# Altium PCB MOTOR_DRIVER.PcbDoc (part 2 of 2)
Units mm, origin at the board's own origin, x right, y up, seen from the top; angles counter-clockwise.
Board outline 115 x 60 mm, 2 copper layers (Top Layer, Bottom Layer), stack 1.58 mm thick; 121 components, 33 nets, 418 pads, 33 vias.
Unrouted connection lines stored in the file: 233.
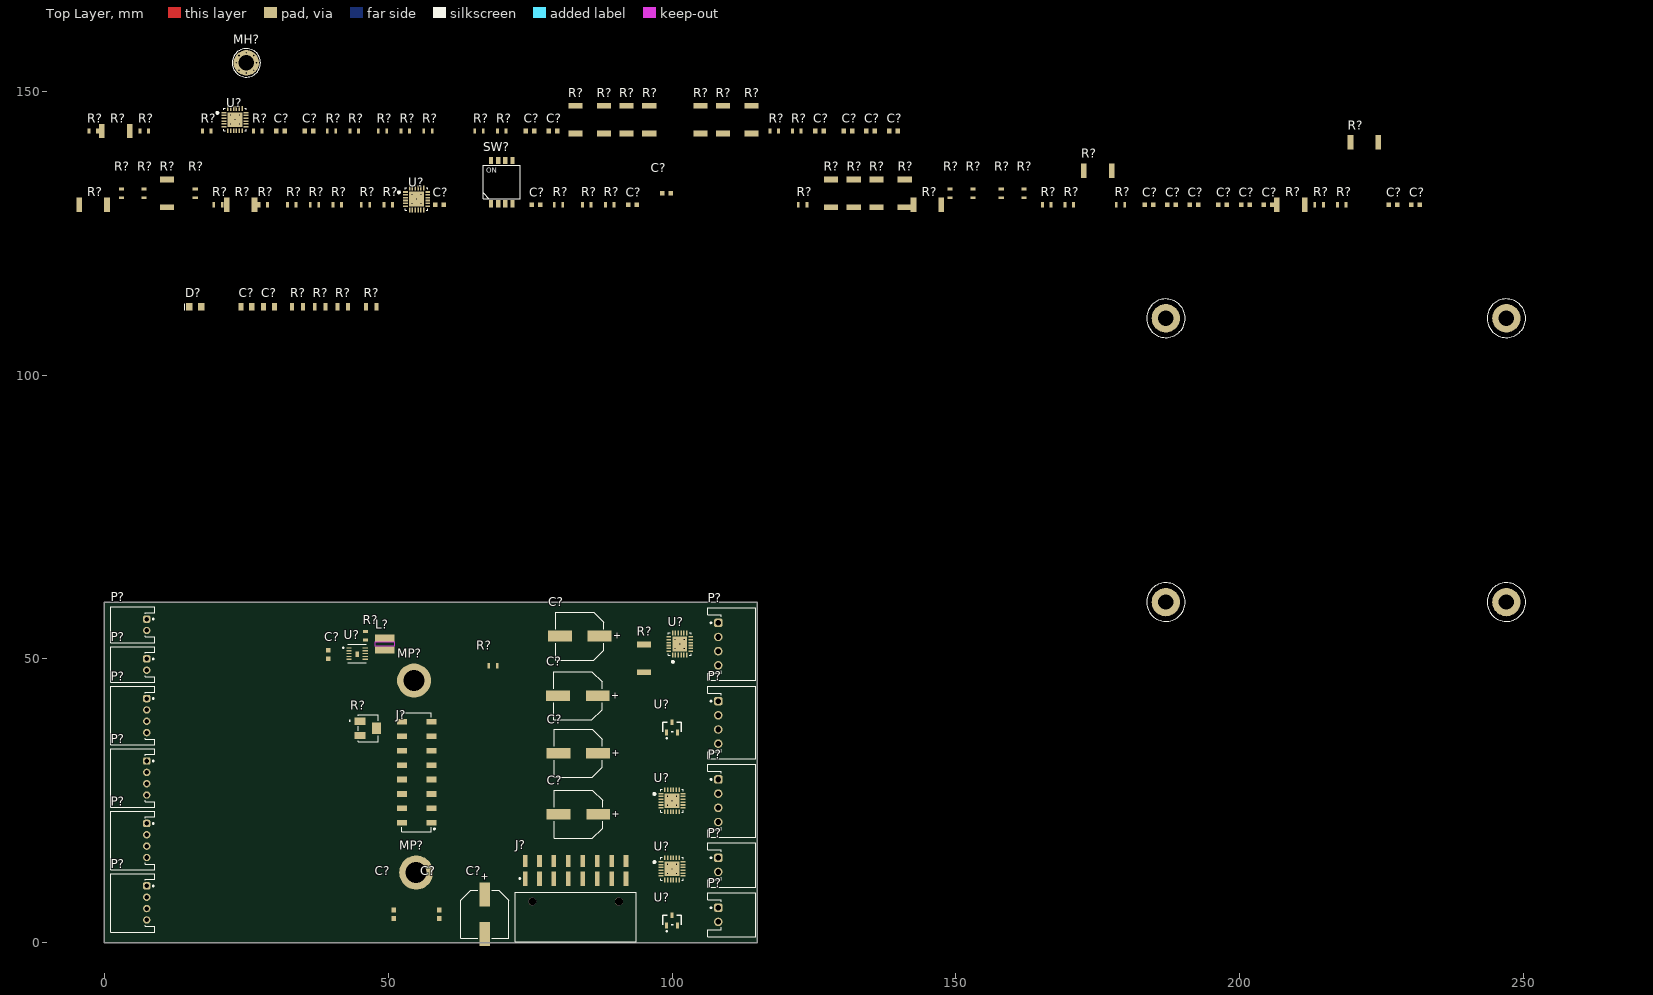
[diagram p0: Top Layer view]

## Part data (continued)
R?: library part 3224W-1-103G, "TRIMMER 10K OHM 0.25W J LEAD TOP", Manufacturer=Bourns, Max Operating Temperature=150°C, Max Power Dissipation=250mW, Min Operating Temperature=-65°C, Supplier Part Number=3224W-1-103GCT-ND, Temperature Coefficient=100ppm/°C, Tolerance=10%, Working Voltage=300V, Category="Variable Resistors and Potentiometers", ComponentLink1Description=https://datasheet.octopart.com:443/3224W-1-103G-Bourns-datasheet-182141393.pdf?src-supplier=IHS, ComponentLink1URL=https://datasheet.octopart.com:443/3224W-1-103G-Bourns-datasheet-182141393.pdf?src-supplier=IHS, ComponentLink2Description=https://datasheet.octopart.com:443/3224W-1-103G-Bourns-datasheet-156011607.pdf?src-supplier=element14+APAC, ComponentLink2URL=https://datasheet.octopart.com:443/3224W-1-103G-Bourns-datasheet-156011607.pdf?src-supplier=element14+APAC, ComponentLink3Description=https://datasheet.octopart.com:443/3224W-1-103G-Bourns-datasheet-64275176.pdf?src-supplier=Master+Electronics, ComponentLink3URL=https://datasheet.octopart.com:443/3224W-1-103G-Bourns-datasheet-64275176.pdf?src-supplier=Master+Electronics, ComponentLink4Description=https://datasheet.octopart.com:443/3224W-1-103G-Bourns-datasheet-11533694.pdf?src-supplier=Arrow+Electronics, ComponentLink4URL=https://datasheet.octopart.com:443/3224W-1-103G-Bourns-datasheet-11533694.pdf?src-supplier=Arrow+Electronics, ComponentLink5Description=http://sigma.octopart.com:80/conflict_mineral_statement/Bourns-company-36.pdf?src-supplier=Compliance+Statements, ComponentLink5URL=http://sigma.octopart.com:80/conflict_mineral_statement/Bourns-company-36.pdf?src-supplier=Compliance+Statements, Composition=Cermet, Depth=3.9mm, Height=5.1mm, Length=4.8mm, Lifecycle Status=Production, Manufacturer Part Number=3224W-1-103G, Military Standard=Not, Mounting Technology="Surface Mount", Number of Terminals=3, Number of Turns=12, Packaging="Tape & Reel (TR)", Power Rating=250mW, Pricing="1=3.93, 10=3.271, 25=3.038, 50=2.8722, 100=2.7147, 250=2.51884, 500=2.3796 (USD)", REACH SVHC=No, RoHS=Compliant, Stock=792, Supplier=DigiKey, Termination=SMD/SMT, Width=3.5mm
SW?: "WS-DISV Small Compact SMD Dip Switch, Flat Actuator with Top Tape, pitch 1.27mm, 4p", Manufacturer="Wurth Elektronik", Max Operating Temperature=85°C, Min Operating Temperature=-40°C, Rated Current Non-Switching=100mA, Rated Current Switching=25mA, Rated Voltage Non-Switching=50VDC, Rated Voltage Switching=24VDC, Actuator Type="Flat Type", Category="Dip Switches", ComponentLink1Description="Website Link", ComponentLink1URL=https://www.we-online.com/redexpert/article/416131160804?ad, ComponentLink2Description="Datasheet Link", ComponentLink2URL=https://www.we-online.com/redexpert/spec/416131160804?ad, Contact Material="Copper Alloy", Contact Plating=Gold, Manufacturer Part Number=416131160804, Match Code=WS-DISV, Mount="Surface Mount", Number of Poles=4, Operation Force=500g, Packaging="Tape and Reel", Pitch=1.27mm
U? U? U?: "IC MTR DRVR BIPLR 7-45V 24TFQFPN", Manufacturer=STMicroelectronics, Supplier Part Number=497-17713-1-ND, Category="Motor Drives", ComponentLink1Description=https://datasheet.ciiva.com:443/pdfs/VipMasterIC/IC/SGST/SGST-S-A0005002811/SGST-S-A0005002811-1.pdf?src-supplier=IHS+Markit, ComponentLink1URL=https://datasheet.ciiva.com:443/pdfs/VipMasterIC/IC/SGST/SGST-S-A0005002811/SGST-S-A0005002811-1.pdf?src-supplier=IHS+Markit, ComponentLink2Description=http://www.farnell.com/datasheets/2549178.pdf?src-supplier=Farnell, ComponentLink2URL=http://www.farnell.com/datasheets/2549178.pdf?src-supplier=Farnell, ComponentLink3Description=http://www.st.com/content/ccc/resource/technical/document/datasheet/group3/64/0a/8b/fb/e5/29/46/34/DM00436631/files/DM00436631.pdf/jcr:content/translations/en.DM00436631.pdf?src-supplier=Digikey, ComponentLink3URL=http://www.st.com/content/ccc/resource/technical/document/datasheet/group3/64/0a/8b/fb/e5/29/46/34/DM00436631/files/DM00436631.pdf/jcr:content/translations/en.DM00436631.pdf?src-supplier=Digikey, ComponentLink4Description=https://datasheet.octopart.com/STSPIN820-STMicroelectronics-datasheet-99887157.pdf?src-supplier=Newark, ComponentLink4URL=https://datasheet.octopart.com/STSPIN820-STMicroelectronics-datasheet-99887157.pdf?src-supplier=Newark, ComponentLink5Description=http://www.farnell.com/datasheets/2549178.pdf?src-supplier=Newark, ComponentLink5URL=http://www.farnell.com/datasheets/2549178.pdf?src-supplier=Newark, ComponentLink6Description=https://datasheet.octopart.com/STSPIN820-STMicroelectronics-datasheet-163660309.pdf?src-supplier=SHENGYU+ELECTRONICS, ComponentLink6URL=https://datasheet.octopart.com/STSPIN820-STMicroelectronics-datasheet-163660309.pdf?src-supplier=SHENGYU+ELECTRONICS, Manufacturer Part Number=STSPIN820, Pricing="1=3.03, 10=2.271, 25=2.0804, 100=1.8709, 250=1.77096, 500=1.71068, 1000=1.66108 (USD)", Reach SVHC Compliant=Yes, RoHS=Yes, RoHS Compliant=Yes, Stock=11767, Supplier=Digikey, Throw Configuration="STEPPER MOTOR CONTROLLER"
U? U?: "IC MOTOR DRIVER 7V-45V 24TQFPN", Drain to Source Resistance=500mΩ, Manufacturer=STMicroelectronics, Max Operating Temperature=150°C, Max Output current=1.5A, Max Supply Voltage=45V, Min Operating Temperature=-40°C, Min Supply Voltage=7V, Operating Supply Voltage=36V, Output Voltage=48V, Supplier Part Number=497-18119-1-ND, Category="Motor Drivers", China RoHS=Compliant, ComponentLink1Description=https://datasheet.octopart.com:443/STSPIN840-STMicroelectronics-datasheet-116891059.pdf?src-supplier=ODG+(Origin+Data+Global), ComponentLink1URL=https://datasheet.octopart.com:443/STSPIN840-STMicroelectronics-datasheet-116891059.pdf?src-supplier=ODG+(Origin+Data+Global), Height - Seated (Max)=1.1mm, Interface=Parallel, Length=4mm, Lifecycle Status=Production, Manufacturer Part Number=STSPIN840, Number of Circuits=1, Number of Terminals=24, Output Current=1.5A, Pricing="1=2.95, 10=2.208, 25=2.022, 100=1.8174, 250=1.71984, 500=1.66102, 1000=1.61261 (USD)", REACH SVHC=Yes, RoHS=Compliant, Schedule B="8542390000, 8542390000|8542390000|8542390000|8542390000|8542390000", Stock=9342, Supplier=DigiKey, Terminal Pitch=500µm, Width=4mm
U? U?: "IC VREF SHUNT ADJ 0.25% SOT23-3", Case/Package=SOT-23, Cathode Current=400µA, Manufacturer=STMicroelectronics, Max Operating Temperature=125°C, Max Output current=100mA, Max Output Voltage=1.243V, Max Supply Voltage=25V, Min Operating Temperature=-40°C, Min Output Voltage=1.237V, Min Supply Voltage=1.24V, Output Voltage=24V, Supplier Part Number=497-4637-1-ND, Temperature Coefficient=100ppm/°C, Tolerance=0.25%, Category="Voltage References", China RoHS=Compliant, ComponentLink1Description=https://datasheet.octopart.com:443/TS3431CILT-STMicroelectronics-datasheet-12523092.pdf?src-supplier=SHENGYU+ELECTRONICS, ComponentLink1URL=https://datasheet.octopart.com:443/TS3431CILT-STMicroelectronics-datasheet-12523092.pdf?src-supplier=SHENGYU+ELECTRONICS, ComponentLink2Description=https://datasheet.octopart.com:443/TS3431CILT-STMicroelectronics-datasheet-10408717.pdf?src-supplier=Upverter, ComponentLink2URL=https://datasheet.octopart.com:443/TS3431CILT-STMicroelectronics-datasheet-10408717.pdf?src-supplier=Upverter, ComponentLink3Description=https://datasheet.octopart.com:443/TS3431CILT-STMicroelectronics-datasheet-124172.pdf?src-supplier=Farnell, ComponentLink3URL=https://datasheet.octopart.com:443/TS3431CILT-STMicroelectronics-datasheet-124172.pdf?src-supplier=Farnell, ComponentLink4Description=https://datasheet.octopart.com:443/TS3431CILT-STMicroelectronics-datasheet-140368796.pdf?src-supplier=TME, ComponentLink4URL=https://datasheet.octopart.com:443/TS3431CILT-STMicroelectronics-datasheet-140368796.pdf?src-supplier=TME, ComponentLink5Description=https://datasheet.octopart.com:443/TS3431CILT-STMicroelectronics-datasheet-18487.pdf?src-supplier=DigiKey, ComponentLink5URL=https://datasheet.octopart.com:443/TS3431CILT-STMicroelectronics-datasheet-18487.pdf?src-supplier=DigiKey, Height=1.02mm, Height - Seated (Max)=1.12mm, Lead Free="Lead Free", Length=2.9mm, Lifecycle Status=Production, Manufacturer Part Number=TS3431CILT, Mounting Technology="Surface Mount", Nominal Output Voltage=1.24V, Nominal Supply Current=400µA, Nominal Supply Voltage=1.24V, Number of Channels=1, Number of Circuits=1, Number of Outputs=1, Number of Terminals=3, Output Current=100mA, Packaging="Tape and Reel", Pins=3, Pricing="1=0.62, 10=0.44, 25=0.3944, 100=0.3441, 250=0.32016, 500=0.30574, 1000=0.29386 (USD)", Radiation Hardening=No, REACH SVHC=Yes, Reference Type="Adjustable, Shunt", Reference Voltage=1.24V, RoHS=Compliant, Schedule B="8542390000, 8542390000|8542390000|8542390000|8542390000|8542390000", Stock=16066, Supplier=DigiKey, Terminal Pitch=950µm, Termination=SMD/SMT, Width=1.3mm
U?: "IC REG BUCK 3.3V 300MA 10DFN", Manufacturer=STMicroelectronics, Max Operating Temperature=150°C, Max Output current=300mA, Max Output Voltage=60V, Max Switching Frequency=2.42MHz, Min Input Voltage=3.5V, Min Operating Temperature=-40°C, Min Output Voltage=850mV, Nominal Output Voltage=3.3V, Nominal Supply Voltage=24V, Quiescent Current=10µA, Supplier Part Number=497-L7983PU33RCT-ND, Category="Voltage Regulators - Switching", China RoHS=Compliant, Country of Origin="Mainland China", Export Control Classification Number (ECCN) Code=EAR99, Harmonized Tariff Schedule (HTS) Code=8542.39.00.60, Height - Seated (Max)=800µm, Introduction Date=2020-10-06, Length=3mm, Lifecycle Status=Production, Manufacturer Part Number=L7983PU33R, Max Supply Voltage=60V, Number of Circuits=1, Number of Terminals=10, Output Current=300mA, Packaging="Tape and Reel", Pricing="1=2.69, 10=2.001, 25=1.83, 100=1.6411, 250=1.55108, 500=1.5155 (USD)", REACH SVHC=Yes, RoHS=Compliant, Schedule B="8542390000, 8542390000|8542390000|8542390000|8542390000|8542390000|8542390000|8542390000|8542390000|8542390000|8542390000|8542390000|8542390000|8542390000|8542390000|8542390000|8542390000|8542390000|8542390000|8542390000|8542390000|8542390000|8542390000|8542390000|85", Stock=4366, Supplier=DigiKey, Synchronous Rectifier=Yes, Terminal Pitch=500µm, Topology=Buck, Width=3mm

## Via types
v1: diameter 0.4, hole 0.2, Top Layer to Bottom Layer, 25 vias
v2: diameter 0.6, hole 0.3, Top Layer to Bottom Layer, 8 vias

## Nets (pads, with @x,y where several pads share a name; then routed paths per layer and width w, separated by ;. In a path a pad name is that pad's centre, name@x,y a point inside that pad or via, vN(x,y) a via of type N, cw(c..) or ccw(c..) an arc to the next point about the centre after c; other vN are vias at no path point)
+3V3: C?.2@39.425,51.5 C?.2@51,5.75 C?.2@59,5.75 J?.2@52.4,21.11 J?.4@52.4,23.65 J?.6@52.4,26.19 J?.8@52.4,28.73 L?.2 R?.1@6.25,143 R?.1@17.25,143 R?.2@66.75,143 R?.2@70.75,143 R?.2@89.75,130 R?.2@149,132.75 R?.2@158,132.75 R?.2@214.75,130 R?.2@-1.25,143 SW?.5 SW?.6 SW?.7 SW?.8 U?.1@43.052,51.925 U?.2@43.052,51.425 U?.23@99.25,26.945 U?.23@99.405,51.85
+24V_PSU: C?.1@67,8.5 C?.1@86.925,43.5 C?.1@86.975,33.35 C?.1@87,22.6 C?.1@87.25,54 C?.2@29.95,112 C?.2@93.75,130 C?.2@135.75,143 C?.2@139.75,143 C?.2@197.75,130 C?.2@227.75,130 J?.1@74.11,11.26 J?.2@74.11,14.39 J?.3@76.65,11.26 J?.4@76.65,14.39 J?.5@79.19,11.26 J?.6@79.19,14.39 J?.7@81.73,11.26 J?.8@81.73,14.39 R?.2@34.95,112 R?.2@38.95,112 R?.2@42.95,112 R?.2@47.95,112 U?.7@45.948,50.425 U?.8@45.948,50.925 U?.9@22.75,143.055 U?.9@54.75,129.055 U?.9@99.75,11.055 U?.9@99.75,23.055 U?.9@103.295,52.35 U?.10@23.25,143.055 U?.10@55.25,129.055 U?.10@100.25,11.055 U?.10@100.25,23.055 U?.10@103.295,52.85
+VREF_DCMT: C?.2@126.75,143 C?.2@131.75,143 R?.1@162,131.25 R?.2@27.75,143 U?.1@98.055,26.25 U?.1@100.1,50.655 U?.2@98.055,25.75 U?.2@100.6,50.655
+VREF_STPR: R?.1@3,131.25 R?.2@46.75,130
CO_FLOO: R?.2@122.75,143
DCA: R?.2@28.75,130 SW?.4 U?.18@24.945,146.25 U?.18@56.945,132.25 U?.18@101.945,14.25
DIR_X: R?.2@166.75,130 U?.20@100.75,14.945
DIR_Y: R?.2@153,132.75 U?.20@23.75,146.945
DIR_Z: R?.2@80.75,130 U?.20@55.75,132.945
DR_ENA: R?.2@16,132.75 R?.2@85.75,130 R?.2@179.75,130
GND: C?.1@24.05,112 C?.1@28.05,112 C?.1@30.25,143 C?.1@35.25,143 C?.1@39.425,50 C?.1@51,4.25 C?.1@58.25,130 C?.1@59,4.25 C?.1@74.25,143 C?.1@75.25,130 C?.1@78.25,143 C?.1@92.25,130 C?.1@98.25,132 C?.1@125.25,143 C?.1@130.25,143 C?.1@134.25,143 C?.1@138.25,143 C?.1@183.25,130 C?.1@187.25,130 C?.1@191.25,130 C?.1@196.25,130 C?.1@200.25,130 C?.1@204.25,130 C?.1@226.25,130 C?.1@230.25,130 C?.2@67,1.5 C?.2@79.925,43.5 C?.2@79.975,33.35 C?.2@80,22.6 C?.2@80.25,54 D?.1 HS?.H1 HS?.H2 J?.9@84.27,11.26 J?.10@84.27,14.39 J?.11@86.81,11.26 J?.12@86.81,14.39 J?.13@89.35,11.26 J?.14@89.35,14.39 J?.15@91.89,11.26 J?.16@91.89,14.39 MH?.H MP?.1 R?.1@7,131.25 R?.1@19.25,130 R?.1@27.25,130 R?.1@32.25,130 R?.1@36.25,130 R?.1@39.25,143 R?.1@40.25,130 R?.1@43.25,143 R?.1@45,39 R?.1@48.25,143 R?.1@49.25,130 R?.1@52.25,143 R?.1@56.25,143 R?.1@67.7,48.775 R?.1@79.25,130 R?.1@122.25,130 R?.1@153,131.25 R?.1@165.25,130 R?.1@169.25,130 R?.1@217.25,130 R?.2@0.45,130 R?.2@3,132.75 R?.2@4.45,143 R?.2@11,134.45 R?.2@26.45,130 R?.2@45.975,53.3 R?.2@83,147.45 R?.2@88,147.45 R?.2@92,147.45 R?.2@95.075,52.525 R?.2@96,147.45 R?.2@105,147.45 R?.2@109,147.45 R?.2@114,147.45 R?.2@128,134.45 R?.2@132,134.45 R?.2@136,134.45 R?.2@141,134.45 R?.2@147.45,130 R?.2@162,132.75 R?.2@177.45,136 R?.2@211.45,130 R?.2@224.45,141 U?.2@21.055,145.75 U?.2@53.055,131.75 U?.2@98.055,13.75 U?.3@21.055,145.25 U?.3@53.055,131.25 U?.3@98.055,13.25 U?.3@98.055,25.25 U?.3@100,4.832 U?.3@100,38.832 U?.3@101.1,50.655 U?.10@45.948,51.925 U?.11@44.5,50.775 U?.18@100.1,54.545 U?.18@101.945,26.25 U?.21@99.405,52.85 U?.21@100.25,26.945 U?.22@99.75,26.945 U?.22@99.405,52.35 U?.25
  other v1: 99.2,12.2 100.8,12.2 100,13 99.2,13.8 100.8,13.8 99.2,24.2 100.8,24.2 100,25 99.2,25.8 100.8,25.8 100.55,51.8 102.15,51.8 101.35,52.6 100.55,53.4 102.15,53.4 54.2,130.2 55.8,130.2 55,131 54.2,131.8 55.8,131.8 22.2,144.2 23.8,144.2 23,145 22.2,145.8 23.8,145.8
  other v2: 25,153.2 23.7,153.7 26.3,153.7 23.2,155 26.8,155 23.7,156.3 26.3,156.3 25,156.8
GND_ISO: J?.10@52.4,31.27 J?.12@52.4,33.81 J?.14@52.4,36.35 J?.16@52.4,38.89
MS1: R?.2@41.75,130 SW?.1 U?.21@23.25,146.945 U?.21@55.25,132.945 U?.21@100.25,14.945
MS2: R?.2@37.75,130 SW?.2 U?.22@22.75,146.945 U?.22@54.75,132.945 U?.22@99.75,14.945
MS3: R?.2@33.75,130 SW?.3 U?.23@22.25,146.945 U?.23@54.25,132.945 U?.23@99.25,14.945
NetC?_2: C?.2@25.95,112 U?.3@43.052,50.925 U?.5@43.052,49.925
NetD?_2: D?.2 R?.1@33.05,112 R?.1@37.05,112 R?.1@41.05,112 R?.1@46.05,112
NetL?_1: L?.1 U?.9@45.948,51.425
NetP?_1: P?.1@108.15,14.95 U?.7@98.75,23.055 U?.12@101.25,23.055
NetP?_2: P?.2@108.15,12.45 U?.8@99.25,23.055 U?.11@100.75,23.055
NetP?_3: P?.3@108.15,23.75 U?.12@56.25,129.055
NetP?_4: P?.4@108.15,35.05 U?.11@100.75,11.055
NetR?_1: R?.1@128,129.55 R?.1@132,129.55 U?.13@101.945,11.75 U?.14@101.945,12.25 U?.15@101.945,12.75
NetR?_2: R?.2@123.75,130 U?.24@53.75,132.945
SP_DIR: R?.2@44.75,143 U?.20@100.75,26.945
SP_ENA: R?.2@118.75,143
SP_PWM: R?.2@40.75,143 U?.19@101.25,26.945
STP_X: R?.2@170.75,130 U?.19@101.25,14.945
STP_Y: R?.2@218.75,130 U?.19@24.25,146.945
STP_Z: R?.2@7,132.75 U?.19@56.25,132.945
VAC_DIR: R?.2@18.75,143 R?.2@53.75,143 U?.20@99.405,53.35
VAC_SPEED: R?.2@47.9,37.75 R?.2@49.75,143 U?.19@99.405,53.85
VREF_STPR: C?.2@76.75,130 C?.2@201.75,130 C?.2@231.75,130 U?.1@21.055,146.25 U?.1@53.055,132.25 U?.1@98.055,14.25
pads on no net: C?.2@31.75,143 C?.2@36.75,143 C?.2@59.75,130 C?.2@75.75,143 C?.2@79.75,143 C?.2@99.75,132 C?.2@184.75,130 C?.2@188.75,130 C?.2@192.75,130 C?.2@205.75,130 J?.1@57.6,21.11 J?.3@57.6,23.65 J?.5@57.6,26.19 J?.7@57.6,28.73 J?.9@57.6,31.27 J?.11@57.6,33.81 J?.13@57.6,36.35 J?.15@57.6,38.89 J?.MH1 J?.MH2 P?.1@7.45,10 P?.1@7.45,21 P?.1@7.45,32 P?.1@7.45,43 P?.1@7.45,50 P?.1@7.45,57 P?.1@108.15,6.15 P?.1@108.15,28.75 P?.1@108.15,42.55 P?.1@108.15,56.35 P?.2@7.45,8 P?.2@7.45,19 P?.2@7.45,30 P?.2@7.45,41 P?.2@7.45,48 P?.2@7.45,55 P?.2@108.15,3.65 P?.2@108.15,26.25 P?.2@108.15,40.05 P?.2@108.15,53.85 P?.3@7.45,6 P?.3@7.45,17 P?.3@7.45,28 P?.3@7.45,39 P?.3@108.15,37.55 P?.3@108.15,51.35 P?.4@7.45,4 P?.4@7.45,15 P?.4@7.45,26 P?.4@7.45,37 P?.4@108.15,21.25 P?.4@108.15,48.85 R?.1@11,129.55 R?.1@16,131.25 R?.1@21.55,130 R?.1@26.25,143 R?.1@45.25,130 R?.1@45.975,54.8 R?.1@65.25,143 R?.1@69.25,143 R?.1@83,142.55 R?.1@84.25,130 R?.1@88,142.55 R?.1@88.25,130 R?.1@92,142.55 R?.1@95.075,47.625 R?.1@96,142.55 R?.1@105,142.55 R?.1@109,142.55 R?.1@114,142.55 R?.1@117.25,143 R?.1@121.25,143 R?.1@136,129.55 R?.1@141,129.55 R?.1@142.55,130 R?.1@149,131.25 R?.1@158,131.25 R?.1@172.55,136 R?.1@178.25,130 R?.1@206.55,130 R?.1@213.25,130 R?.1@219.55,141 R?.1@-0.45,143 R?.1@-2.75,143 R?.1@-4.45,130 R?.2@7.75,143 R?.2@20.75,130 R?.2@50.75,130 R?.2@57.75,143 R?.2@69.2,48.775 R?.3 U?.1@99.05,3.035 U?.1@99.05,37.035 U?.2@100.95,3.035 U?.2@100.95,37.035 U?.4 U?.5@21.055,144.25 U?.5@53.055,130.25 U?.5@98.055,12.25 U?.5@98.055,24.25 U?.5@102.1,50.655 U?.6 U?.7@21.75,143.055 U?.7@53.75,129.055 U?.7@98.75,11.055 U?.7@103.295,51.35 U?.8@22.25,143.055 U?.8@54.25,129.055 U?.8@99.25,11.055 U?.8@103.295,51.85 U?.11@23.75,143.055 U?.11@55.75,129.055 U?.11@103.295,53.35 U?.12@24.25,143.055 U?.12@101.25,11.055 U?.12@103.295,53.85 U?.13@24.945,143.75 U?.13@56.945,129.75 U?.13@101.945,23.75 U?.13@102.6,54.545 U?.14@24.945,144.25 U?.14@56.945,130.25 U?.14@101.945,24.25 U?.14@102.1,54.545 U?.15@24.945,144.75 U?.15@56.945,130.75 U?.15@101.6,54.545 U?.15@101.945,24.75 U?.16 U?.17 U?.24@21.75,146.945 U?.24@98.75,14.945 U?.24@98.75,26.945 U?.24@99.405,51.35

## Text inside footprints (layer, text, board x,y; h text height)
C?: Top Overlay "+" at 67.5,10.9 h1.22 r90
C?: Top Overlay "+" at 89.65,53.5 h1.22
C?: Top Overlay "+" at 89.325,43 h1.22
C?: Top Overlay "+" at 89.375,32.85 h1.22
C?: Top Overlay "+" at 89.4,22.1 h1.22
SW?: Top Overlay "ON" at 67.295,135.6 h0.89; Top Component Outline "ON" at 67.295,135.6 h0.89